# EAGLE board brushed_UAS_Design_preautoroute (EAGLE 9.6.2)
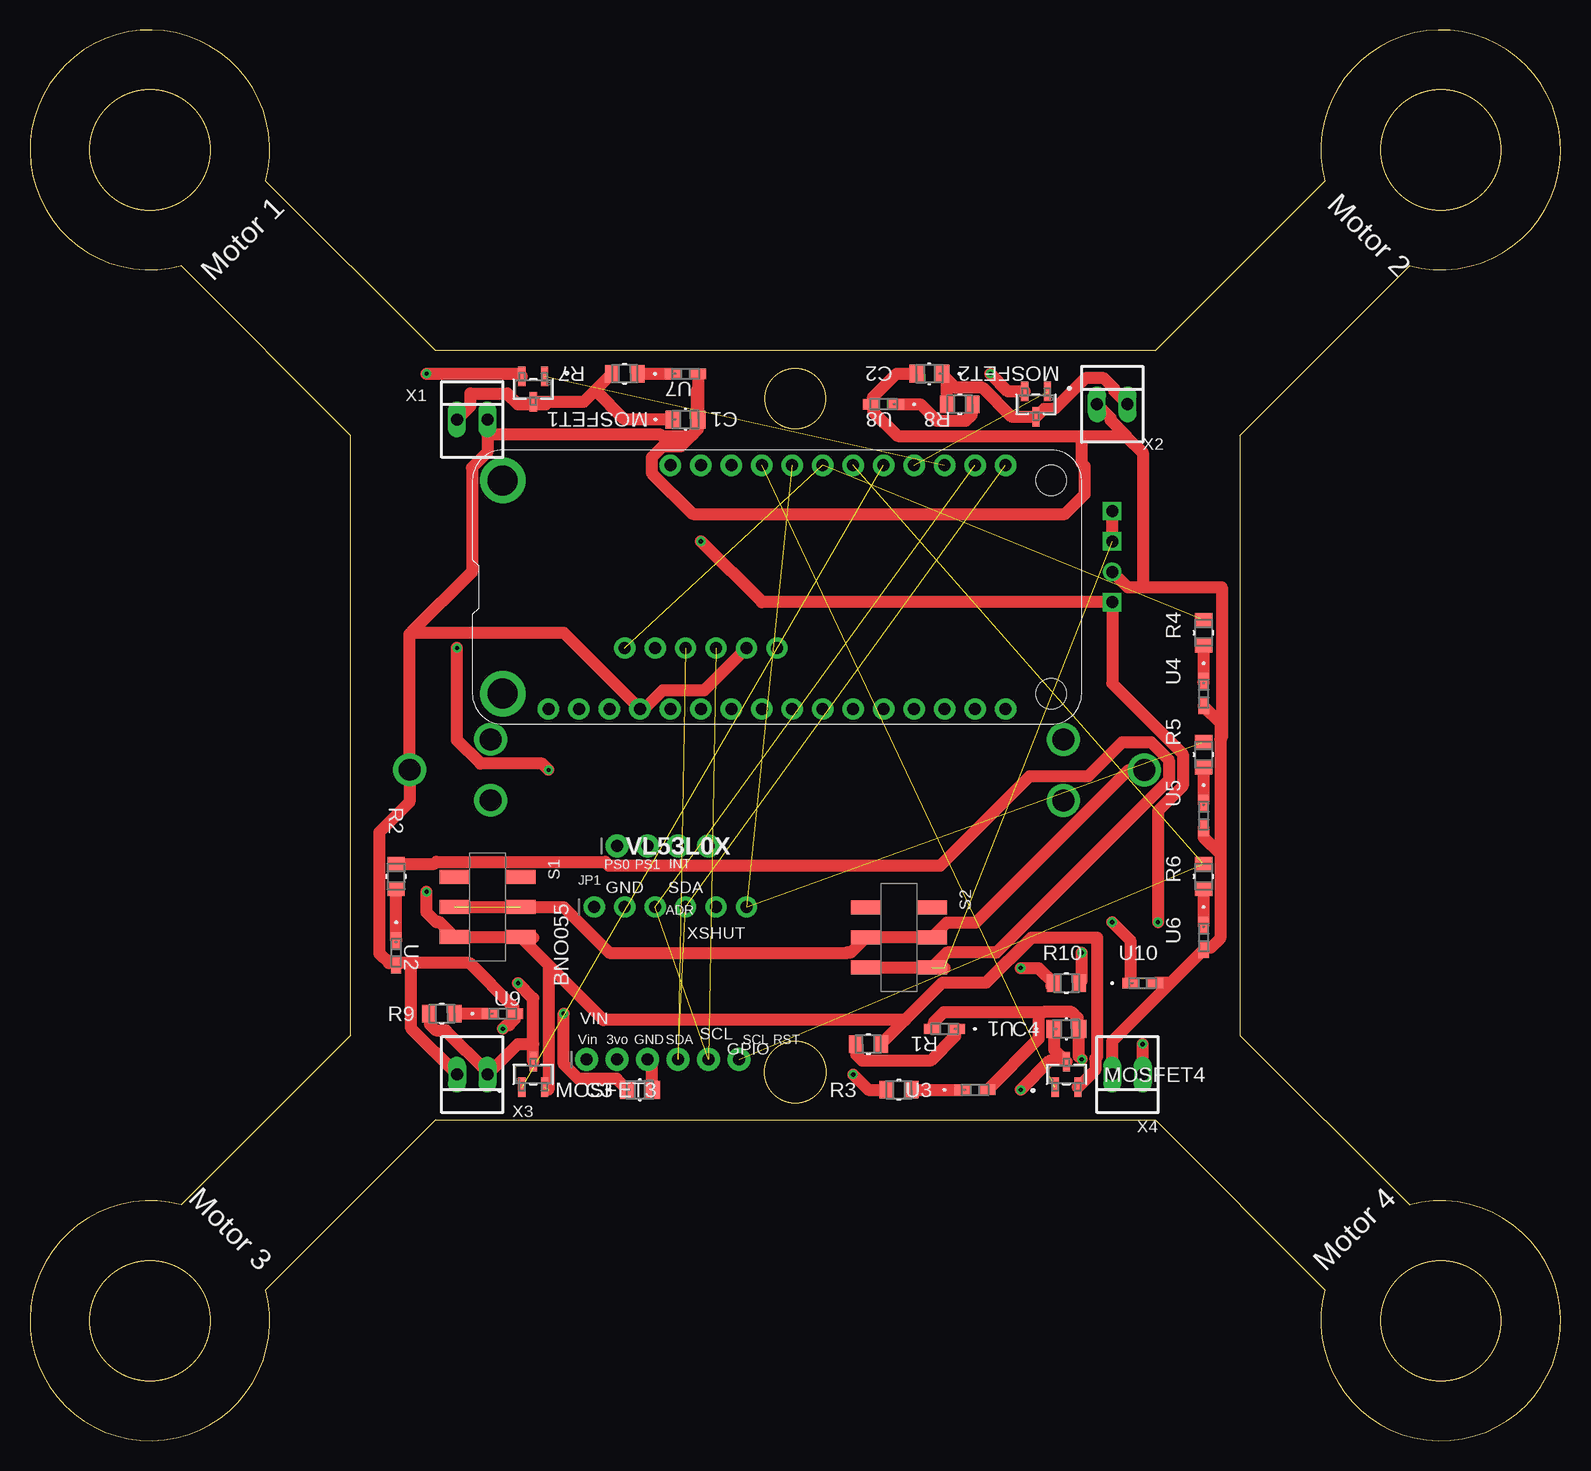
[diagram p0: board, top side]
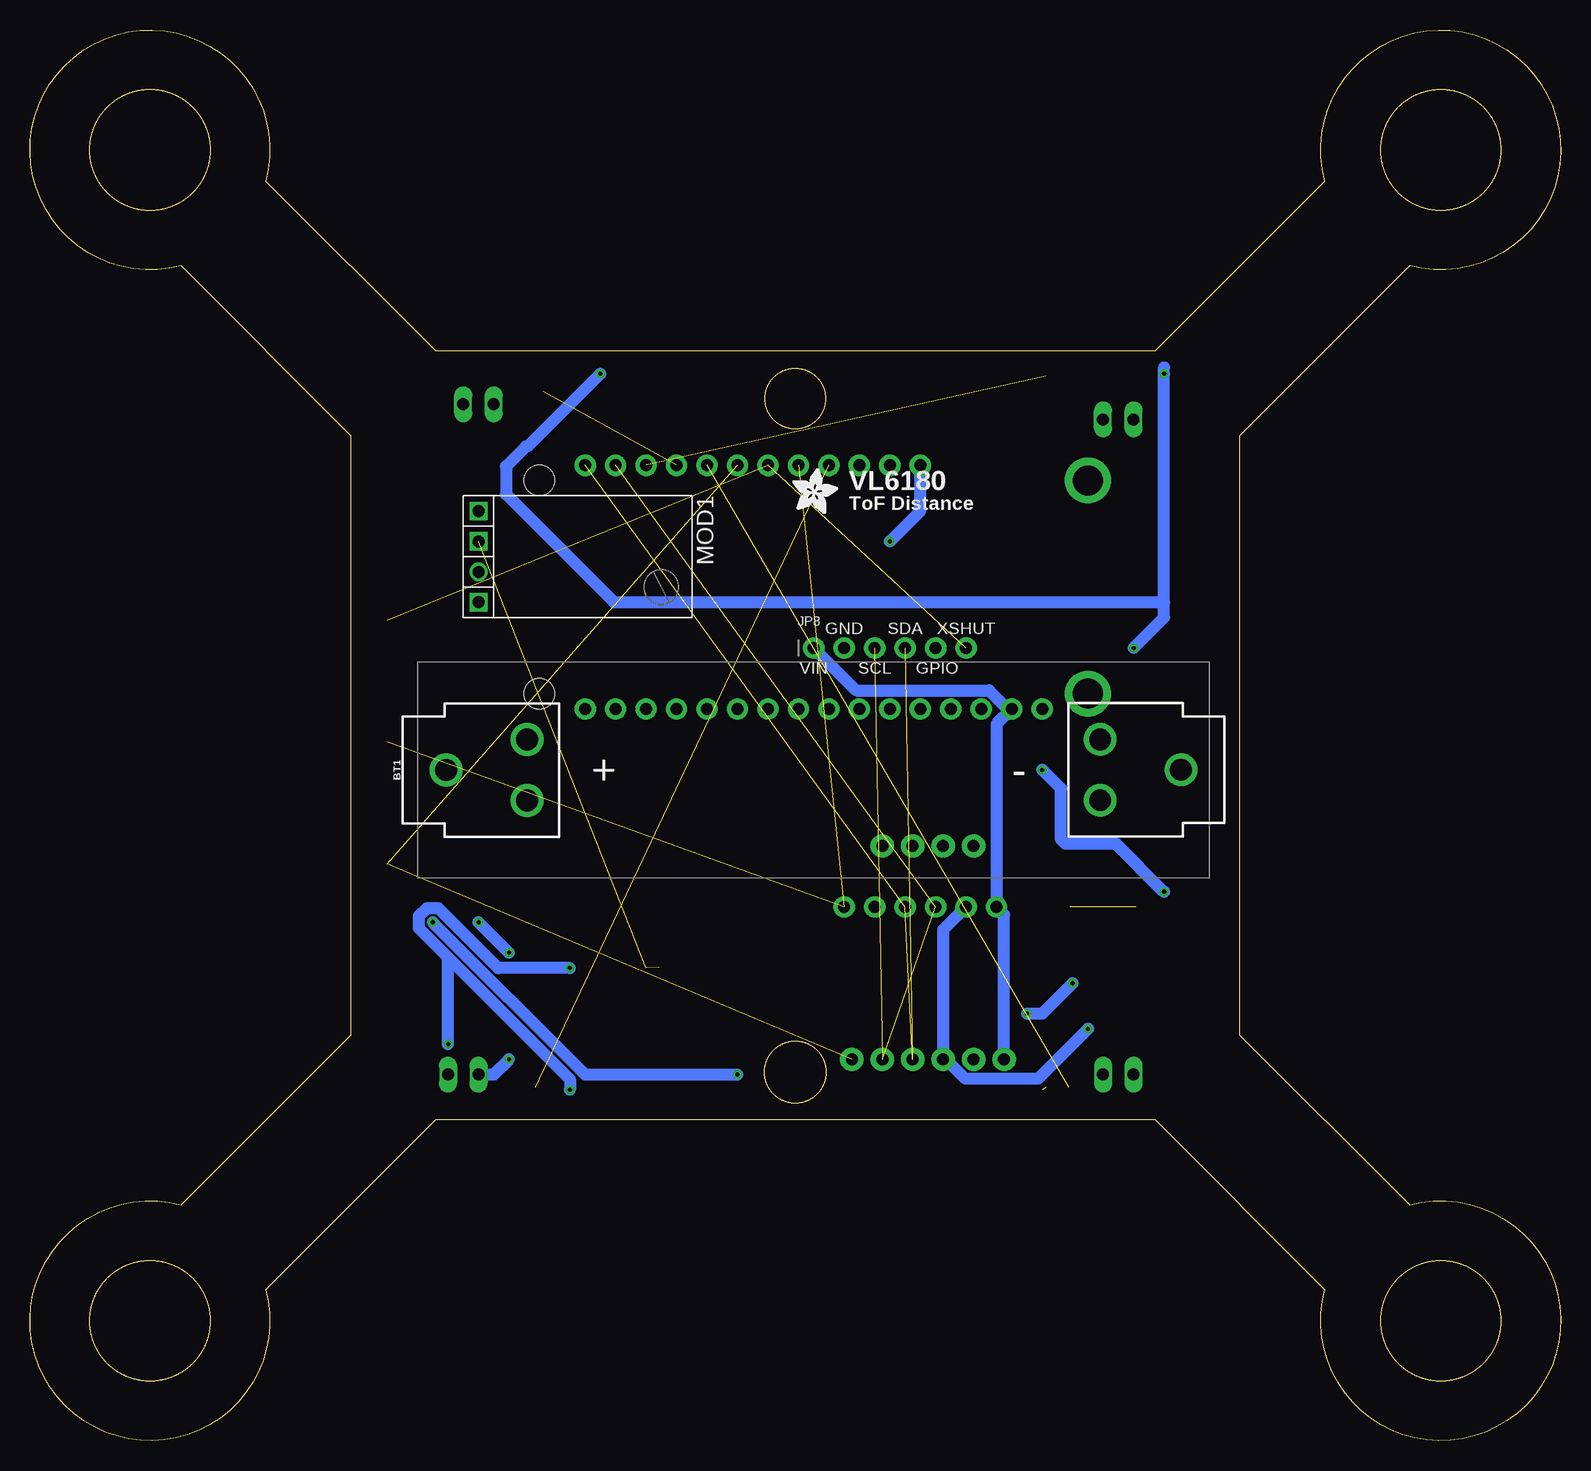
[diagram p1: board, bottom side, seen from below]

Size 127.6 x 117.6 mm. Coordinates in mm from the lower left corner, seen from the top.
Outline: 100.87,83.8 115.01,97.94 arc300 107.94,105.01 93.8,90.87 33.8,90.87 19.66,105.01 arc300 12.59,97.94 26.73,83.8 26.73,33.8 12.59,19.66 arc300 19.66,12.59 33.8,26.73 93.8,26.73 107.94,12.59 arc300 115.01,19.66 100.87,33.8 100.87,83.8
Outline: circle at 117.6,107.6 radius 5
Outline: circle at 117.6,10 radius 5
Outline: circle at 63.8,30.73 radius 2.55
Outline: circle at 10,10 radius 5
Outline: circle at 63.8,86.87 radius 2.5
Outline: circle at 10,107.6 radius 5
Copper layers (1*16): Top 0.035mm / dielectric 1.5mm / Bottom 0.035mm
Design rules "default": minimum track width 6mil, minimum drill 0.35mm, track to track 6mil, track to pad 6mil, pad to pad 6mil, via to via 6mil, smd to smd 6mil, copper to edge 40mil, drill to drill 6mil, minimum pad ring 10mil, minimum via ring 8mil, stop-mask expansion 4mil, vias tented up to drill 0mil, thermal gap 10mil

## Footprints (pad centres in the part's own frame; a part is rotated, then mirrored left to right if it is on the bottom)
BATTERY_18650-HOLDER = drill 1.829: GND@1 30.628,0.01; GND@2 23.88,2.55; GND@3 23.88,-2.53; PWR@1 -30.628,-0.01; PWR@2 -23.88,2.53; PWR@3 -23.88,-2.55
CAP_J1_PAN-M = smd 1.27 x 1.499: 1 -1.029,0; 2 1.029,0
1X06_ROUND_70 = drill 1 pad 1.778: 1 -6.35,0; 2 -3.81,0; 3 -1.27,0; 4 1.27,0; 5 3.81,0; 6 6.35,0
1X06_ROUND_76 = drill 1 pad 1.93: 1 -6.35,0; 2 -3.81,0; 3 -1.27,0; 4 1.27,0; 5 3.81,0; 6 6.35,0
1X04_ROUND_76 = drill 1 pad 1.93: 1 -3.81,0; 2 -1.27,0; 3 1.27,0; 4 3.81,0
POLOLU_D24VXAYV_HC = drill 1: G 1.27,-8.89 | drill 1 square: I -1.27,-8.89; O 3.81,-8.89; S -3.81,-8.89
SOT-23_TO-236_VIS-M = smd 0.61 x 1.626: 1 -0.95,-1.067; 2 0.95,-1.067; 3 0,1.067
FEATHERWING_DIM = drill 1 pad 1.778: 1 6.35,1.27; 2 8.89,1.27; 3 11.43,1.27; 4 13.97,1.27; 5 16.51,1.27; 6 19.05,1.27; 7 21.59,1.27; 8 24.13,1.27; 9 26.67,1.27; 10 29.21,1.27; 11 31.75,1.27; 12 34.29,1.27; 13 36.83,1.27; 14 39.37,1.27; 15 41.91,1.27; 16 44.45,1.27; 17 44.45,21.59; 18 41.91,21.59; 19 39.37,21.59; 20 36.83,21.59; 21 34.29,21.59; 22 31.75,21.59; 23 29.21,21.59; 24 26.67,21.59; 25 24.13,21.59; 26 21.59,21.59; 27 19.05,21.59; 28 16.51,21.59 | drill 2.5 pad 3.81: P$1 2.54,20.32; P$2 2.54,2.54 | hole 2.54: 48.26,20.32; 48.26,2.54
BO_CR0805-M = smd 1.168 x 1.448: 1 -1.054,0; 2 1.054,0
SW_JS202011SCQN = smd 1.2 x 2.5: 1 -2.5,-2.75; 2 0,-2.75; 3 2.5,-2.75; 4 -2.5,2.75; 5 0,2.75; 6 2.5,2.75
L196L-QBC_AOP-M = smd 1.372 x 0.864: 1 -1.023,0; 2 1.023,0
22-23-2021 = drill 1 long: 1 -1.27,0; 2 1.27,0

## Placement (x,y rotation side)
BT1  [BATTERY_18650-HOLDER]  62.27,55.92 0 bottom
C1  ECH-U1H102JX5CAP_J1_PAN-M  [CAP_J1_PAN-M]  54.65,85.13 0 top
C2  ECH-U1H102JX5CAP_J1_PAN-M  [CAP_J1_PAN-M]  74.97,88.94 180 top
C3  ECH-U1H102JX5CAP_J1_PAN-M  [CAP_J1_PAN-M]  50.84,29.25 0 top
C4  ECH-U1H102JX5CAP_J1_PAN-M  [CAP_J1_PAN-M]  86.4,34.33 0 top
JP1  [1X06_ROUND_70]  53.38,44.49 0 top
JP3  [1X06_ROUND_76]  52.75,31.79 0 top
JP4  [1X04_ROUND_76]  52.75,49.57 0 top
JP8  [1X06_ROUND_70]  55.92,66.08 0 bottom
MOD1  POLOLU_D24V3AXV  [POLOLU_D24VXAYV_HC]  81.32,73.7 270 bottom
MOSFET1  SI2342DS-T1-GE3SOT-23_TO-236_VIS-M  [SOT-23_TO-236_VIS-M]  41.95,87.67 180 top
MOSFET2  SI2342DS-T1-GE3SOT-23_TO-236_VIS-M  [SOT-23_TO-236_VIS-M]  83.86,86.4 180 top
MOSFET3  SI2342DS-T1-GE3SOT-23_TO-236_VIS-M  [SOT-23_TO-236_VIS-M]  41.95,30.52 0 top
MOSFET4  SI2342DS-T1-GE3SOT-23_TO-236_VIS-M  [SOT-23_TO-236_VIS-M]  86.4,30.52 0 top
MS1  FEATHERWING_NODIM  [FEATHERWING_DIM]  36.87,59.73 0 top
R1  CR0805-FX-1000ELFBO_CR0805-M  [BO_CR0805-M]  69.89,33.06 180 top
R2  CR0805-FX-1000ELFBO_CR0805-M  [BO_CR0805-M]  30.52,47.03 270 top
R3  CR0805-FX-1000ELFBO_CR0805-M  [BO_CR0805-M]  72.43,29.25 0 top
R4  CR0805-FX-1000ELFBO_CR0805-M  [BO_CR0805-M]  97.83,67.35 270 top
R5  CR0805-FX-1000ELFBO_CR0805-M  [BO_CR0805-M]  97.83,57.19 270 top
R6  CR0805-FX-1000ELFBO_CR0805-M  [BO_CR0805-M]  97.83,47.03 270 top
R7  CR0805-FX-1000ELFBO_CR0805-M  [BO_CR0805-M]  49.57,88.94 0 top
R8  CR0805-FX-1000ELFBO_CR0805-M  [BO_CR0805-M]  77.51,86.4 0 top
R9  CR0805-FX-1000ELFBO_CR0805-M  [BO_CR0805-M]  34.33,35.6 0 top
R10  CR0805-FX-1000ELFBO_CR0805-M  [BO_CR0805-M]  86.4,38.14 0 top
S1  JS202011SCQN  [SW_JS202011SCQN]  38.14,44.49 270 top
S2  JS202011SCQN  [SW_JS202011SCQN]  72.43,41.95 270 top
U1  L196L-QBCL196L-QBC_AOP-M  [L196L-QBC_AOP-M]  76.24,34.33 180 top
U2  L196L-QBCL196L-QBC_AOP-M  [L196L-QBC_AOP-M]  30.52,40.68 270 top
U3  L196L-QBCL196L-QBC_AOP-M  [L196L-QBC_AOP-M]  78.78,29.25 0 top
U4  L196L-QBCL196L-QBC_AOP-M  [L196L-QBC_AOP-M]  97.83,62.27 270 top
U5  L196L-QBCL196L-QBC_AOP-M  [L196L-QBC_AOP-M]  97.83,52.11 270 top
U6  L196L-QBCL196L-QBC_AOP-M  [L196L-QBC_AOP-M]  97.83,41.95 270 top
U7  L196L-QBCL196L-QBC_AOP-M  [L196L-QBC_AOP-M]  54.65,88.94 0 top
U8  L196L-QBCL196L-QBC_AOP-M  [L196L-QBC_AOP-M]  71.16,86.4 180 top
U9  L196L-QBCL196L-QBC_AOP-M  [L196L-QBC_AOP-M]  39.41,35.6 0 top
U10  L196L-QBCL196L-QBC_AOP-M  [L196L-QBC_AOP-M]  92.75,38.14 0 top
U$19  [ADAFRUIT_3.5MM]  64.05,77.26 0 bottom
X1  22-23-2021  [22-23-2021]  36.87,85.13 0 top
X2  22-23-2021  [22-23-2021]  90.21,86.4 0 top
X3  22-23-2021  [22-23-2021]  36.87,30.52 180 top
X4  22-23-2021  [22-23-2021]  91.48,30.52 180 top

## Library data of the parts
BT1 = SparkFun-Batteries; PROD_ID: BATT-12327; SF_SKU: PRT-13113
C1-C4 = UAS_Capacitor; BUILT_BY: EMA_UL_Team; MANUFACTURER_PART_NUMBER: ECH-U1H102JX5; SOURCELIBRARY: Panasonic_2014-06-20; VENDOR: Panasonic
JP1 JP3 JP4 JP8 U$19 = microbuilder
MOD1 = _hhn_Pololu
MOSFET1-MOSFET4 = Import1; BUILT_BY: EMA_Cory; COPYRIGHT: Copyright (C) 2018 Accelerated Designs. All rights reserved; DATASHEET: http://www.vishay.com/docs/63302/si2342ds.pdf; MANUFACTURER_PART_NUMBER: SI2342DS-T1-GE3; SOURCELIBRARY: Vishay_2020-03-16; VENDOR: Vishay
MS1 = adafruit
R1-R10 = 100_Ohm_Resistor; BUILT_BY: EMA_UL_Team; MANUFACTURER_PART_NUMBER: CR0805-FX-1000ELF; SOURCELIBRARY: Bourns_2014-12-31; VENDOR: Bourns Electronics
S1 S2 = JS202011SCQN; DESCRIPTION: Slide Switch DPDT Surface Mount; DIGI-KEY_PART_NUMBER: 401-2002-1-ND; MF: C&K; MP: JS202011SCQN; PACKAGE: None; PURCHASE-URL: https://pricing.snapeda.com/search/part/JS202011SCQN/?ref=eda
U1-U10 = UAS_LED; BUILT_BY: EMA_Colton; COPYRIGHT: Copyright (C) 2018 Accelerated Designs. All rights reserved; DATASHEET: https://www.aopled.com/AOP_PDFs/L196L-QBC.pdf; MANUFACTURER_PART_NUMBER: L196L-QBC; SOURCELIBRARY: Add_to_database_2020-12-29; VENDOR: American Opto Plus
X1-X4 = con-molex; MF: MOLEX; MPN: 22-23-2021; OC_FARNELL: 1462926; OC_NEWARK: 25C3832

## Nets
0: BT1.GND@1 C1.2 C2.2 C3.2 C4.2 JP1.2 JP3.3 JP8.2 MOD1.G MS1.4 U1.2 U2.2 U3.2 U4.2 U5.2 U6.2 U7.2 U8.2 U9.2 U10.2 X1.2 X2.1 X3.2 X4.2
3V: JP1.1 JP3.1 JP8.1 MS1.2
N$1: BT1.PWR@1 S1.2 S1.5 S2.2 S2.5
N$2: MOSFET1.2 MOSFET2.2 MOSFET3.2 MOSFET4.2 R1.1 S1.3 S1.6
N$3: R1.2 U1.1
N$4: R2.2 U2.1
N$5: R3.2 U3.1
N$6: MOD1.I MOD1.S R2.1 S2.3 S2.6
N$7: MOSFET1.1 MS1.19
N$8: MOSFET2.1 MS1.20
N$9: R4.2 U4.1
N$10: R5.2 U5.1
N$11: R6.2 U6.1
N$12: MOSFET4.1 MS1.25
N$13: MOSFET3.1 MS1.21
N$14: JP1.4 JP3.4 JP8.4 MS1.17
N$15: C4.1 MOSFET4.3 R10.1 X4.1
N$16: JP8.6 MS1.23 R4.1
N$17: R10.2 U10.1
N$18: R9.2 U9.1
N$19: R8.2 U8.1
N$20: R7.2 U7.1
N$21: JP1.3 JP3.5 JP8.3 MS1.18
N$22: C3.1 MOSFET3.3 R9.1 X3.1
N$23: C1.1 MOSFET1.3 R7.1 X1.1
N$24: C2.1 MOSFET2.3 R8.1 X2.2
N$25: JP1.6 MS1.24 R5.1
N$26: JP3.6 MS1.22 R6.1
VBAT: MOD1.O MS1.28 R3.1

## Tracks (layer width: path | path; a pad name or v marks a point on that pad's centre or on a via)
0  (via drill 0.35)
  Top 1.016: U2.2 30.37,39.81 | 30.37,39.81 29.92,39.81 29.14,40.6 29.14,50.73 31.64,53.23 BT1.GND@1 31.64,67.2 31.79,67.35 | C3.2 51.87,31.4 JP3.3 | 31.79,39.81 36.67,39.81 40.28,36.2 40.28,35.75 U9.2 40.43,35.16 39.94,34.66 39.74,34.66 v39.41,34.33 | 31.79,39.81 30.37,39.81 | X3.2 31.79,34.33 31.79,39.81 | 84.46,35.74 84.08,35.35 84.08,33.52 U3.2 | 84.46,35.74 86.83,35.74 87.33,35.25 87.33,34.43 C4.2 87.43,32.03 v87.67,31.79 | U1.2 75.37,34.48 75.37,34.93 76.18,35.74 84.46,35.74 | 95.04,38.14 U6.2 97.98,41.08 98.43,41.08 99.22,41.87 99.22,48.94 | 95.04,38.14 U10.2 | U5.2 97.83,50.33 99.22,48.94 | U4.2 99.22,59.86 99.22,58.46 | 99.22,58.46 99.22,48.94 | MOD1.G 91.48,71.16 92.75,71.16 | 92.75,71.16 99.35,71.16 99.35,58.59 99.22,58.46 | 31.79,67.35 44.49,67.35 MS1.4 51.19,61 52.74,62.55 56.2,62.55 JP8.2 | X1.2 38.14,83.86 | 38.14,83.86 38.14,82.41 36.85,81.11 36.85,72.41 31.79,67.35 | U7.2 55.68,87.67 | 55.68,87.67 C1.2 55.68,84.32 54.23,82.87 52.74,82.87 51.83,81.96 51.83,80.68 55.25,77.26 86.29,77.26 87.93,78.89 87.93,81.21 87.67,81.46 87.67,83.75 | 55.68,87.67 55.58,87.57 55.58,84.22 55.08,83.72 52.71,83.72 52.57,83.86 38.14,83.86 | X2.1 90.07,85.28 90.07,85.06 91.37,83.75 | 92.75,71.16 92.75,82.38 91.37,83.75 | C2.2 72.23,88.94 70.29,87 70.29,86.55 U8.2 70.29,86.25 70.29,85.8 72.34,83.75 87.67,83.75 | 87.67,83.75 91.37,83.75 | X4.2 90.21,33.31 95.04,38.14
  Bottom 1.016: JP1.2 51.48,42.59 JP3.3 51.24,31.79 49.61,30.17 43.58,30.17 v39.41,34.33 | X4.2 88.94,30.52 v87.67,31.79
3V
  Bottom 1.016: JP8.1 58.74,62.55 47.66,62.55 46.11,61 MS1.2 47.03,59.73 JP1.1 46.4,43.86 JP3.1
N$1  (1 unrouted)
  Top 1.016: S1.2 44.49,44.49 48.3,40.68 68.13,40.68 68.16,40.71 68.44,40.71 S2.2 S2.5 76.42,43.19 78.84,43.19 91.57,55.91 BT1.PWR@1
N$2  (via drill 0.35)  (1 unrouted)
  Top 1.016: S1.6 S1.3 34.15,43.23 33.87,43.23 33.06,44.04 v33.06,45.76 | S1.6 41.91,41.99 41.95,41.95 40.93,41.95 S1.6 | S1.6 43.22,39.66 | 43.22,39.66 43.22,29.25 | R1.1 72.96,35.07 | 72.96,35.07 76.08,38.19 79.71,38.19 83.47,41.95 88.94,41.95 88.94,32.01 88.8,31.86 88.8,30.9 MOSFET4.2 | 72.96,35.07 47.81,35.07 43.22,39.66 | v43.22,55.92 42.7,56.44 37.55,56.44 35.6,58.39 v35.6,66.08 | v33.06,88.94 40.8,88.94 MOSFET1.2 | MOSFET2.2 81.52,87.47 v80.05,88.94
  Bottom 1.016: v33.06,45.76 37.05,49.75 41.28,49.75 41.65,50.12 41.65,54.35 v43.22,55.92 | v35.6,66.08 33.06,68.62 33.06,69.89 | 33.06,69.89 v33.06,88.94 33.06,89.45 | 33.06,69.89 78.92,69.89 87.93,78.89 87.93,81.21 86.26,82.87 86.12,82.87 v80.05,88.94
N$3
  Top 1.016: U1.1 77.11,34.18 77.11,33.73 75.06,31.68 69.38,31.68 68.89,32.17 68.89,33.01 R1.2
N$4
  Top 1.016: U2.1 R2.2
N$5
  Top 1.016: R3.2 U3.1
N$6  (2 unrouted)
  Top 1.016: R2.1 33.7,48.09 33.87,48.25 47.96,48.25 48.26,47.95 75.89,47.95 83.35,55.4 88.22,55.4 91.05,58.23 93.45,58.23 94.93,56.75 94.93,55.07 80.55,40.69 76.42,40.69 S2.6 | S2.3 76.2,39.45 76.24,39.41 | MOD1.I MOD1.S
N$7  (1 unrouted)
N$8  (1 unrouted)
N$9
  Top 1.016: R4.2 U4.1 97.83,63.14
N$10
  Top 1.016: R5.2 U5.1
N$11
  Top 1.016: R6.2 U6.1
N$12  (1 unrouted)
N$13  (1 unrouted)
N$14  (3 unrouted)
N$15  (via drill 0.35)
  Top 1.016: 85.13,37.93 R10.1 84.08,39.41 v82.59,39.41 | 85.35,34.31 C4.1 85.37,32.62 86.3,31.69 | 86.3,31.69 MOSFET4.3 | X4.1 v92.75,33.06 | v82.59,29.25 85.03,31.69 86.3,31.69
  Bottom 1.016: v92.75,33.06 92.75,40.3 | 92.75,40.3 95.19,42.74 95.19,43.71 94.51,44.39 93.54,44.39 88.56,39.41 v82.59,39.41 | 92.75,40.3 82.59,30.14 v82.59,29.25
N$16  (2 unrouted)
N$17  (via drill 0.35)
  Top 1.016: R10.2 87.67,38.36 v87.67,40.68 | v90.21,43.22 91.73,41.7 U10.1
  Bottom 1.016: v87.67,40.68 v90.21,43.22
N$18
  Top 1.016: R9.2 U9.1
N$19
  Top 1.016: U8.1 74.22,86.4 75.6,85.02 78.02,85.02 78.51,85.51 78.51,86.35 R8.2
N$20
  Top 1.016: R7.2 U7.1
N$21  (3 unrouted)
N$22  (via drill 0.35)
  Top 1.016: C3.1 48.9,30.17 45.72,30.17 44.49,31.4 v44.49,35.6 | MOSFET3.3 41.95,33.06 | 41.95,33.06 41.95,36.87 v40.68,38.14 | R9.1 33.33,35.55 33.33,34.71 33.82,34.22 34.66,34.22 38.14,30.74 X3.1 40.68,33.06 41.95,33.06
  Bottom 1.016: v44.49,35.6 43.22,35.6 v40.68,38.14
N$23
  Top 1.016: MOSFET1.3 43.22,86.6 | 43.22,86.6 46.18,86.6 47.14,87.56 | 47.14,87.56 R7.1 | C1.1 49.57,85.13 47.14,87.56 | X1.1 36.73,86.26 36.73,87.3 39.78,87.3 40.68,86.4 43.02,86.4 43.22,86.6
N$24
  Top 1.016: R8.1 76.46,88.48 C2.1 77.16,87.79 79.42,87.79 81.87,85.33 MOSFET2.3 84.52,86 85.39,86 87.96,88.57 89.53,88.57 90.36,87.74 90.36,87.53 X2.2
N$25  (2 unrouted)
N$26  (2 unrouted)
VBAT  (via drill 0.35)
  Top 1.016: v55.92,74.97 61,69.89 MOD1.O 90.21,63.13 96.1,57.24 96.1,54.59 94.02,52.51 v94.02,43.22 | v68.62,30.52 69.89,29.25 R3.1
  Bottom 1.016: v55.92,74.97 53.38,77.51 MS1.28 | v94.02,43.22 81.32,30.52 v68.62,30.52

## Text on the board
tPlace: VL53L0X | PS0 | PS1 | INT | GND | SDA | ADR | XSHUT | BNO055 | VIN | Vin | 3vo | GND | SDA | SCL | SCL | RST | GPIO
bPlace: VL6180 | ToF Distance | XSHUT | SDA | GND | GPIO | SCL | VIN
tNames: Motor 2 | Motor 1 | Motor 3 | Motor 4